# EAGLE board Smarttree_CMU_6 (EAGLE 7.7.0)
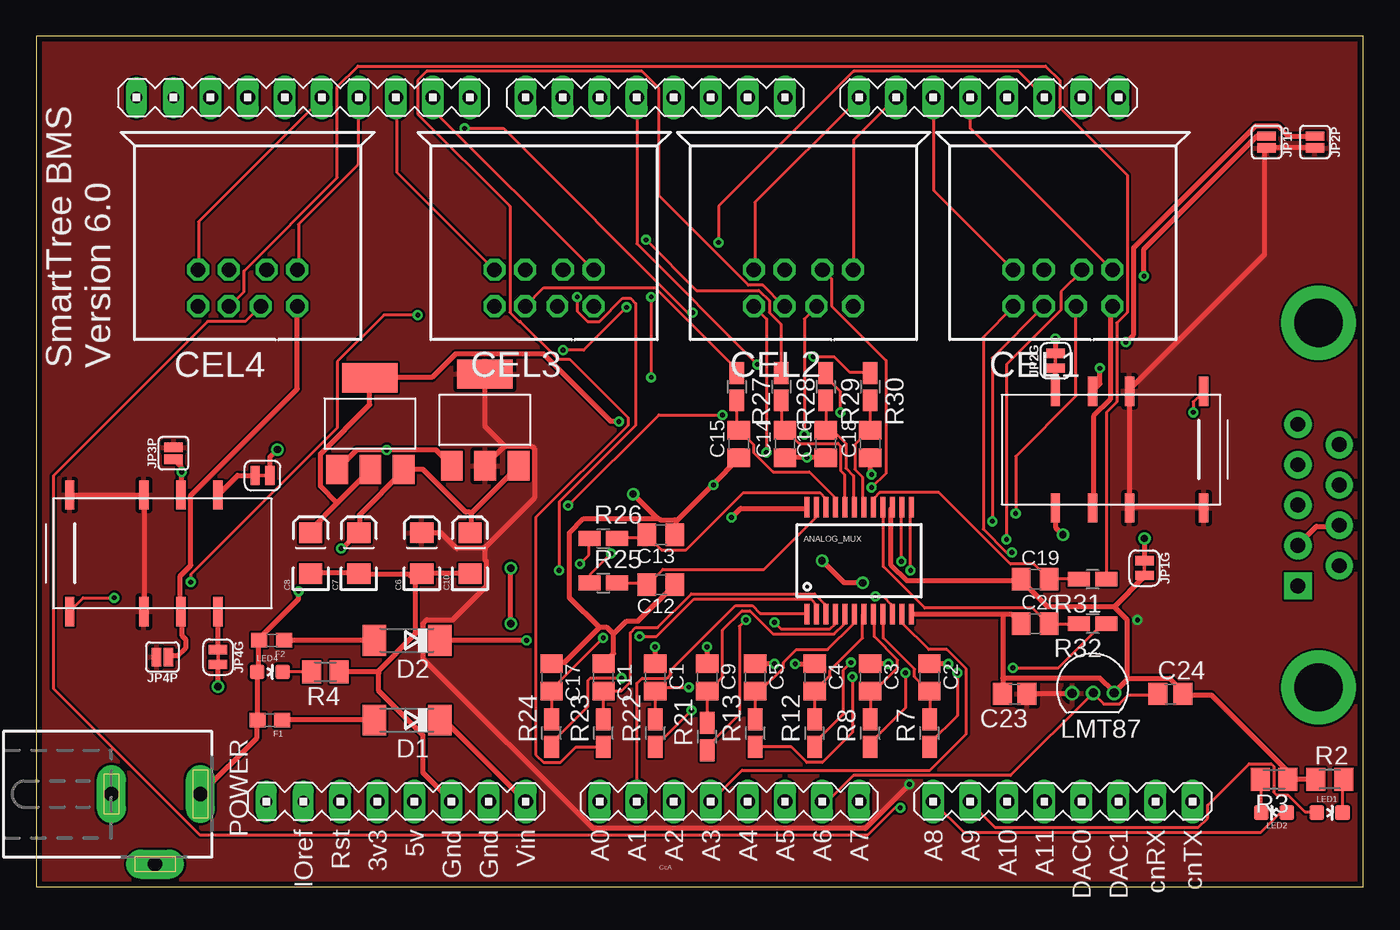
[diagram p0: board, top side]
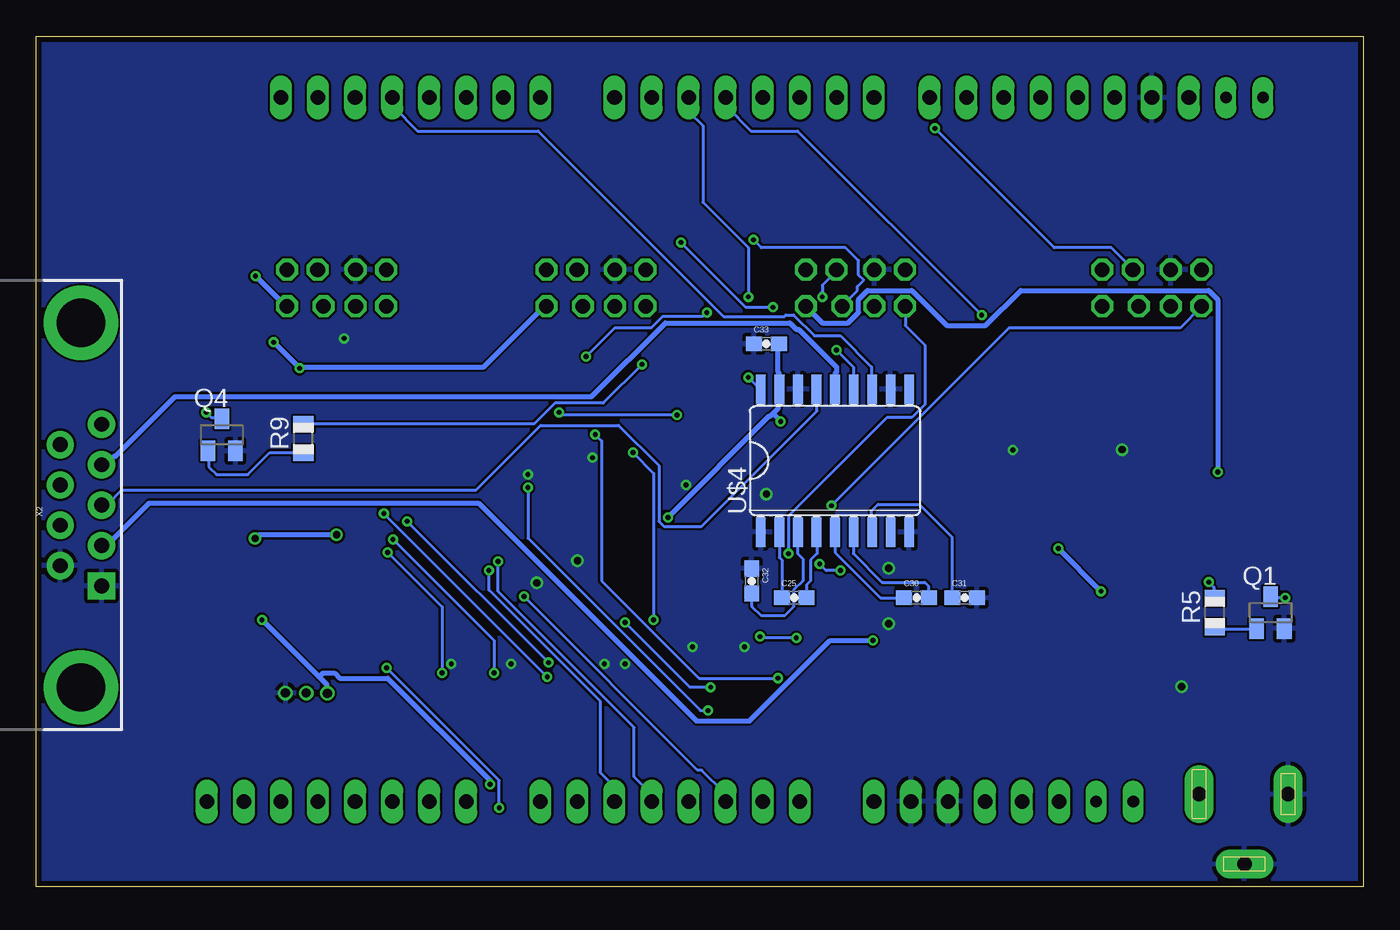
[diagram p1: board, bottom side, seen from below]

Size 90.93 x 58.29 mm. Coordinates in mm from the lower left corner, seen from the top.
Outline: 0,0 90.93,0 90.93,58.29 0,58.29 0,0
Copper layers (1*16): Top 0.0356mm / dielectric 1.5011mm / Bottom 0.0356mm
Design rules "LaenPCBOrder": minimum track width 6mil, minimum drill 13mil, track to track 6mil, track to pad 6mil, pad to pad 6mil, via to via 6mil, smd to smd 6mil, copper to edge 15mil, drill to drill 6mil, minimum pad ring 7mil, minimum via ring 7mil, stop-mask expansion 3mil, vias tented up to drill 0mil, thermal gap 10mil
Net classes: 1 power: width 0.33 mm, clearance 0.152 mm

## Footprints (pad centres in the part's own frame; a part is rotated, then mirrored left to right if it is on the bottom)
SOT223 = smd 1.499 x 2.007: 1 -2.261,-3.15; 2 0.025,-3.15; 3 2.311,-3.15 | smd 3.81 x 2.007: 4 0,3.15
SSOP24 = smd 0.348 x 1.397: 1 -3.575,-3.656; 2 -2.925,-3.656; 3 -2.275,-3.656; 4 -1.625,-3.656; 5 -0.975,-3.656; 6 -0.325,-3.656; 7 0.325,-3.656; 8 0.975,-3.656; 9 1.625,-3.656; 10 2.275,-3.656; 11 2.925,-3.656; 12 3.575,-3.656; 13 3.575,3.656; 14 2.925,3.656; 15 2.275,3.656; 16 1.625,3.656; 17 0.975,3.656; 18 0.325,3.656; 19 -0.325,3.656; 20 -0.975,3.656; 21 -1.625,3.656; 22 -2.275,3.656; 23 -2.925,3.656; 24 -3.575,3.656
C-0805 = smd 1.27 x 1.524: 1 -0.953,0; 2 0.953,0
EIA3216 = smd 1.4 x 1.6: A 1.4,0; C -1.4,0
C0805 = smd 1.3 x 1.5: 1 -0.85,0; 2 0.85,0
0603-CAP = smd 1.1 x 1: 1 -0.85,0; 2 0.85,0
8PINCONN = drill 1 octagon: 1 -1.3,-8.5; 2 1.3,-8.5; 3 -3.4,-8.5; 4 -1.3,-11; 5 3.4,-8.5; 6 -3.4,-11; 7 0.9,-11; 8 3.4,-11
SOD106-R = smd 1.6 x 2.1: A 2.25,0; C -2.25,0
0603 = smd 1.1 x 1: 1 -0.85,0; 2 0.85,0
SMT-JUMPER_2_NC_TRACE_SILK = smd 0.635 x 1.27: 1 -0.508,0; 2 0.508,0
SMT-JUMPER_2_NO_SILK = smd 0.635 x 1.27: 1 -0.406,0; 2 0.406,0
LED-0603 = smd 1 x 1: A 0,-0.877; C 0,0.877
LMT87_TO = drill 0.635: GND 0.305,-1.346; OUT 1.727,-1.346; VDD 3.175,-1.321
DCJ0202 = drill 1 pad 2 long: 1 0,3.1; 2 4.8,0; 3 0,-3
SOT23 = smd 1 x 1.4: 1 -0.95,-1.1; 2 0.95,-1.1; 3 0,1.1
M0805 = smd 1.3 x 1.6: 1 -0.95,0; 2 0.95,0
R0805 = smd 1.1 x 1.4: 1 -1,0; 2 1,0
R0805W = smd 1.5 x 1: 1 -0.94,0; 2 0.94,0
DUE(NORMAL) = drill 1 long: 2 -16.51,30.48; 3 -19.05,30.48; 3V3 -39.37,-17.78; 4 -21.59,30.48; 5 -24.13,30.48; 5V -36.83,-17.78; 6 -26.67,30.48; 7 -29.21,30.48; 8 -33.02,30.48; 9 -35.56,30.48; 10 -38.1,30.48; 11 -40.64,30.48; 12 -43.18,30.48; 13 -45.72,30.48; A0 -24.13,-17.78; A1 -21.59,-17.78; A2 -19.05,-17.78; A3 -16.51,-17.78; A4 -13.97,-17.78; A5 -11.43,-17.78; A6 -8.89,-17.78; A7 -6.35,-17.78; A8 -1.27,-17.78; A9 1.27,-17.78; A10 3.81,-17.78; A11 6.35,-17.78; AREF -50.8,30.48; AREF1 -50.8,30.48; CANRX 13.97,-17.78; CANTX 16.51,-17.78; DAC0 8.89,-17.78; DAC1 11.43,-17.78; GND1 -48.26,30.48; GND_1 -34.29,-17.78; GND_2 -31.75,-17.78; RESET -41.91,-17.78; RX0 -11.43,30.48; RX1 6.35,30.48; RX2 1.27,30.48; RX3 -3.81,30.48; SCL 11.43,30.48; SDA 8.89,30.48; TX0 -13.97,30.48; TX1 3.81,30.48; TX2 -1.27,30.48; TX3 -6.35,30.48; VIN -29.21,-17.78 | drill 0.8 pad 1.422 long: IOREF -44.45,-17.78; NC -46.99,-17.78; SCL1 -55.88,30.48; SDA1 -53.34,30.48
RELAY-EE2 = smd 0.635 x 2: P$1 -6.35,4; P$3 -1.27,4; P$4 1.27,4; P$5 3.81,4; P$8 3.81,-4; P$9 1.27,-4; P$10 -1.27,-4; P$12 -6.35,-4
SO18 = smd 0.66 x 2.032: 1 -5.08,-4.902; 2 -3.81,-4.902; 3 -2.54,-4.902; 4 -1.27,-4.902; 5 0,-4.902; 6 1.27,-4.902; 7 2.54,-4.902; 8 3.81,-4.902; 9 5.08,-4.902; 10 5.08,4.902; 11 3.81,4.902; 12 2.54,4.902; 13 1.27,4.902; 14 0,4.902; 15 -1.27,4.902; 16 -2.54,4.902; 17 -3.81,4.902; 18 -5.08,4.902
DB9_MALE = drill 1.016 pad 1.88: 1 5.54,-1.42; 2 2.77,-1.42; 3 0,-1.42; 4 -2.77,-1.42; 6 4.15,1.42; 7 1.38,1.42; 8 -1.38,1.42; 9 -4.15,1.42 | drill 1.016 pad 1.88 square: 5 -5.54,-1.42 | drill 3.302 pad 5.08: G1 -12.5,0; G2 12.5,0

## Placement (x,y rotation side)
3V3_REG  REG1117  [SOT223]  22.86,31.75 0 top
5V_REG  REG1117  [SOT223]  30.73,32 0 top
ANALOG_MUX  MUX-74HC4067SMD  [SSOP24]  56.39,22.35 0 top
C1  [C-0805]  42.42,14.35 270 top
C2  [C-0805]  61.21,14.35 270 top
C3  [C-0805]  57.15,14.35 270 top
C4  [C-0805]  53.34,14.35 270 top
C5  [C-0805]  49.28,14.35 270 top
C6  10uF  [EIA3216]  26.42,22.86 90 top
C7  0.1uF  [EIA3216]  22.1,22.86 90 top
C8  10uF  [EIA3216]  18.8,22.86 90 top
C9  [C-0805]  45.97,14.35 270 top
C10  0.1uF  [EIA3216]  29.72,22.86 90 top
C11  [C-0805]  38.86,14.35 270 top
C12  [C-0805]  42.8,20.7 180 top
C13  [C-0805]  42.8,24.13 180 top
C14  [C-0805]  51.31,30.35 90 top
C15  [C-0805]  48.13,30.35 90 top
C16  [C-0805]  54.1,30.35 90 top
C17  [C-0805]  35.31,14.35 270 top
C18  [C-0805]  57.15,30.35 90 top
C19  [C-0805]  68.45,21.08 0 top
C20  [C-0805]  68.45,18.03 0 top
C23  [C0805]  67.06,13.21 180 top
C24  [C0805]  77.72,13.21 0 top
C25  0.1uF  [0603-CAP]  38.99,19.81 0 bottom
C30  0.1uF  [0603-CAP]  30.61,19.81 0 bottom
C31  0.1uF  [0603-CAP]  27.3,19.81 0 bottom
C32  0.1uF  [0603-CAP]  41.91,20.95 270 bottom
C33  0.1uF  [0603-CAP]  40.89,37.21 0 bottom
CEL1  8PINCONN  [8PINCONN]  70.36,50.8 0 top
CEL2  8PINCONN  [8PINCONN]  52.58,50.8 0 top
CEL3  8PINCONN  [8PINCONN]  34.8,50.8 0 top
CEL4  8PINCONN  [8PINCONN]  14.48,50.8 0 top
D1  [SOD106-R]  25.4,11.43 180 top
D2  [SOD106-R]  25.4,16.89 180 top
F1  PTC0603  [0603]  16,11.43 180 top
F2  PTC0603  [0603]  16.13,16.89 180 top
JP1G  JUMPER-SMT_2_NC_TRACE_SILK  [SMT-JUMPER_2_NC_TRACE_SILK]  75.95,21.84 270 top
JP1P  JUMPER-SMT_2_NO_SILK  [SMT-JUMPER_2_NO_SILK]  84.33,51.05 270 top
JP2G  JUMPER-SMT_2_NC_TRACE_SILK  [SMT-JUMPER_2_NC_TRACE_SILK]  69.85,36.07 90 top
JP2P  JUMPER-SMT_2_NO_SILK  [SMT-JUMPER_2_NO_SILK]  87.63,51.05 270 top
JP3G  JUMPER-SMT_2_NC_TRACE_SILK  [SMT-JUMPER_2_NC_TRACE_SILK]  15.49,28.19 0 top
JP3P  JUMPER-SMT_2_NO_SILK  [SMT-JUMPER_2_NO_SILK]  9.4,29.72 90 top
JP4G  JUMPER-SMT_2_NC_TRACE_SILK  [SMT-JUMPER_2_NC_TRACE_SILK]  12.45,15.75 270 top
JP4P  JUMPER-SMT_2_NO_SILK  [SMT-JUMPER_2_NO_SILK]  8.64,15.75 180 top
LED1  [LED-0603]  88.65,5.08 270 top
LED2  [LED-0603]  84.84,5.08 90 top
LED4  [LED-0603]  16,14.73 270 top
LMT87  LMT87_PAC  [LMT87_TO]  74.17,11.94 180 top
POWER  DCJ0202  [DCJ0202]  8.13,6.35 270 top
Q1  [SOT23]  6.35,18.8 0 bottom
Q4  [SOT23]  78.23,30.99 0 bottom
R2  330  [M0805]  88.65,7.37 0 top
R3  330  [M0805]  84.84,7.37 180 top
R4  [M0805]  19.81,14.73 180 top
R5  330  [R0805]  10.16,18.8 90 bottom
R7  [R0805W]  61.21,10.54 90 top
R8  [R0805W]  57.15,10.54 90 top
R9  330  [R0805]  72.64,30.73 90 bottom
R12  [R0805W]  53.34,10.54 90 top
R13  [R0805W]  49.28,10.54 90 top
R21  [R0805W]  45.97,10.29 90 top
R22  [R0805W]  42.42,10.54 90 top
R23  [R0805W]  38.86,10.54 90 top
R24  [R0805W]  35.31,10.54 90 top
R25  [R0805W]  38.86,20.83 0 top
R26  [R0805W]  38.86,23.88 0 top
R27  [R0805W]  48.01,34.29 270 top
R28  [R0805W]  51.05,34.29 270 top
R29  [R0805W]  54.1,34.29 270 top
R30  [R0805W]  57.15,34.29 270 top
R31  [R0805W]  72.39,21.08 180 top
R32  [R0805W]  72.39,18.03 180 top
U$1  DUE(OUTLINE)  [DUE(NORMAL)]  62.74,23.62 0 top
U$2  RELAY-SINGLE_LATCH  [RELAY-EE2]  73.66,29.97 180 top
U$3  RELAY-SINGLE_LATCH  [RELAY-EE2]  8.64,22.86 0 top
U$4  MAX3222  [SO18]  36.2,29.21 0 bottom
X2  [DB9_MALE]  87.88,26.16 90 bottom

## Library data of the parts
3V3_REG 5V_REG = burr-brown; MPN: REG1117; OC_FARNELL: 1097566; OC_NEWARK: 14P6981
ANALOG_MUX = SparkFun-AnalogIC; OC_NEWARK: unknown
C1-C5 C9 C11-C20 = cap-pan40; OC_NEWARK: unknown
C6-C8 C10 = SparkFun-Retired; OC_NEWARK: unknown; PROD_ID: CAP-00811
C23 C24 Q1 Q4 R5 R9 = adafruit
C25 C30-C33 F1 F2 = SparkFun
CEL1-CEL4 U$2 U$3 = SmartTreeCan
D1 D2 = diode; OC_NEWARK: unknown
JP1G JP1P JP2G JP2P JP3G JP3P JP4G JP4P = SparkFun-Jumpers
LED1 LED2 LED4 = SparkFun-LED; PROD_ID: DIO-09003
LMT87 = nick
POWER = con-jack; OC_FARNELL: unknown; OC_NEWARK: unknown
R2-R4 = adafruit; OC_NEWARK: unknown
R7 R8 R12 R13 R21-R32 = resistor; OC_NEWARK: unknown
U$1 = DUElib130425
U$4 = Francis-Project
X2 = SparkFun-Connectors; PROD_ID: CONN-09904

## Nets
3.3V [power]: 3V3_REG.2 3V3_REG.4 ANALOG_MUX.24 C8.A C33.2 U$4.17
5V [power]: 5V_REG.2 5V_REG.4 C6.A C23.1 JP1P.2 JP2P.2 JP3P.2 JP4P.2 LMT87.VDD U$2.P$1 U$2.P$3 U$2.P$10 U$3.P$1 U$3.P$3 U$3.P$10
12V [power]: 3V3_REG.3 5V_REG.3 C7.A C10.A F1.2 F2.2 LED4.A POWER.1
!RES_CEL_1&2: R9.2 U$1.4
!RES_CEL_3&4: R5.2 U$1.3
ADDR0: ANALOG_MUX.10 U$1.A2
ADDR1: ANALOG_MUX.11 U$1.A3
ADDR2: ANALOG_MUX.14 U$1.A4
ADDR3: ANALOG_MUX.13 U$1.A5
AOUT: ANALOG_MUX.1 U$1.A1
BUTTON: U$1.A0
CEL1_PWR [power]: CEL1.8 JP1P.1 U$2.P$4
CEL2_PWR [power]: CEL2.8 JP2P.1 U$2.P$9
CEL3_PWR [power]: CEL3.8 JP3P.1 U$3.P$4
CEL4_PWR [power]: CEL4.8 JP4P.1 U$3.P$9
CSI1: CEL1.4 R12.1
CSI2: CEL2.4 R23.1
CSI3: CEL3.4 R27.1
CSI4: CEL4.4 R31.1
CSO1: CEL1.2 R8.1
CSO2: CEL2.2 R22.1
CSO3: CEL3.2 R26.1
CSO4: CEL4.2 R30.1
GND [power]: 3V3_REG.1 5V_REG.1 ANALOG_MUX.12 ANALOG_MUX.15 C1.1 C2.1 C3.1 C4.1 C5.1 C6.C C7.C C8.C C9.1 C10.C C11.1 C12.1 C13.1 C14.1 C15.1 C16.1 C17.1 C18.1 C19.1 C20.1 C23.2 C24.2 C31.2 C32.1 C33.1 CEL1.1 CEL2.1 CEL3.1 CEL4.1 JP1G.2 JP2G.2 JP3G.2 JP4G.2 LMT87.GND POWER.2 POWER.3 Q1.2 Q4.2 R2.1 R3.1 R4.1 U$1.GND1 U$1.GND_1 U$1.GND_2 U$4.1 U$4.9 U$4.11 U$4.16 X2.5 X2.9
L1: LED1.A U$1.A9
L2: LED2.A U$1.A8
N$1 [power]: JP1G.1 U$2.P$5
N$2: C31.1 U$4.7
N$3: Q4.3 U$2.P$12
N$5 [power]: D2.A F2.1
N$6: Q4.1 R9.1
N$7: Q1.1 R5.1
N$8: C25.1 U$4.2
N$9: Q1.3 U$3.P$12
N$10 [power]: JP3G.1 U$3.P$5
N$11 [power]: JP4G.1 U$3.P$8
N$13 [power]: D1.C U$1.VIN
N$14: C25.2 U$4.4
N$15: C30.1 U$4.5
N$16: C30.2 U$4.6
N$17: ANALOG_MUX.6 C5.2 R13.2
N$18: C32.2 U$4.3
N$19: ANALOG_MUX.8 C3.2 R8.2
N$20: ANALOG_MUX.7 C4.2 R12.2
N$21 [power]: JP2G.1 U$2.P$8
N$24: ANALOG_MUX.5 C9.2 R21.2
N$26: ANALOG_MUX.4 C1.2 R22.2
N$28: ANALOG_MUX.3 C11.2 R23.2
N$30: ANALOG_MUX.2 C17.2 R24.2
N$32: ANALOG_MUX.23 C12.2 R25.2
N$34: ANALOG_MUX.22 C13.2 R26.2
N$36: ANALOG_MUX.21 C15.2 R27.2
N$38: ANALOG_MUX.20 C14.2 R28.2
N$39: ANALOG_MUX.19 C16.2 R29.2
N$42: ANALOG_MUX.18 C18.2 R30.2
N$43: ANALOG_MUX.17 C19.2 R31.2
N$46: ANALOG_MUX.16 C20.2 R32.2
N$57: LED1.C R2.2
N$58: LED2.C R3.2
N$59: LED4.C R4.2
N$69 [power]: D1.A F1.1
RI1: CEL1.3 U$1.TX2
RI2: CEL2.3 U$1.TX3
RI3: CEL3.3 U$1.10
RI4: CEL4.3 U$1.12
RO1: CEL1.5 U$1.RX2
RO2: CEL2.5 U$1.RX3
RO3: CEL3.5 U$1.9
RO4: CEL4.5 U$1.11
RX [power]: U$4.14 X2.2
RX1: U$1.RX1 U$4.13
SCRN_PWR [power]: D2.C X2.4 X2.8
SHDN: U$1.2 U$4.18
TS1: CEL1.6 R7.1
TS1OUT: ANALOG_MUX.9 C2.2 R7.2
TS2: CEL2.6 R21.1
TS3: CEL3.6 R25.1
TS4: CEL4.6 R29.1
TS_CON: C24.1 LMT87.OUT U$1.A6
TX: U$4.15 X2.3
TX1: U$1.TX1 U$4.12
VS1: CEL1.7 R13.1
VS2: CEL2.7 R24.1
VS3: CEL3.7 R28.1
VS4: CEL4.7 R32.1

## Tracks (layer width: path | path; a pad name or v marks a point on that pad's centre or on a via)
3.3V  (via drill 0.33)
  Top 0.33: 20.62,26.3 22.85,28.52 3V3_REG.2 | 20.62,26.3 18.85,24.52 18.85,24.35 C8.A | 20.62,26.3 19.47,27.46 19.47,29.68 22.85,33.06 22.85,34.84 3V3_REG.4 23.02,34.93 27.11,34.93 28.71,36.52 34.76,36.52 39.38,31.9 v39.92,31.9 | v47.65,25.32 48.27,25.95 52.81,25.95 ANALOG_MUX.24
  Bottom 0.33: C33.2 40.09,37.15 40.09,35.28 40.01,35.19 U$4.17 40.01,33.06 40.09,32.97 40.09,32.79 40.45,32.44 | v47.65,25.32 40.72,32.26 40.63,32.26 40.45,32.44 | 40.45,32.44 v39.92,31.9
5V  (via drill 0.33)
  Top 0.33: 30.67,23.19 28.8,23.19 27.74,24.26 26.49,24.26 C6.A | 30.67,23.19 34.14,26.66 34.14,30.04 33.96,30.21 32.09,30.21 | 32.09,30.21 30.76,28.88 5V_REG.2 | 32.09,30.21 30.76,31.55 30.76,35.1 5V_REG.4 | U$3.P$10 7.38,18.92 7.38,26.84 U$3.P$3 7.2,26.84 2.31,26.84 U$3.P$1 | C23.1 67.92,13.23 70.94,13.23 LMT87.VDD | JP2P.2 87.57,50.66 84.37,50.66 JP1P.2 84.19,50.57 84.19,43.37 74.94,34.12 U$2.P$10 74.94,33.95 74.94,26.12 U$2.P$3 | U$2.P$3 74.94,26.03 80.01,26.03 U$2.P$1 | 74.94,25.86 U$2.P$3 | v59.83,7.01 56.81,3.99 38.14,3.99 26.49,15.63 26.49,18.03 26.76,18.3 28.54,18.3 30.85,20.61 30.85,22.3 30.76,22.39 30.76,23.1 30.67,23.19
  Bottom 0.33: v75.48,18.3 71.56,14.39 | 71.56,14.39 71.03,13.86 71.03,13.32 LMT87.VDD | v59.83,7.01 59.83,7.28 66.85,14.3 70.14,14.3 70.5,14.66 71.3,14.66 71.56,14.39
  pour Top: -7.62,63.5 -10.16,63.5 -10.16,-12.7 101.6,-12.7 101.6,63.5
12V  (via drill 0.33)
  Top 0.33: 29.78,25.59 29.78,24.35 C10.A | 5V_REG.3 29.78,25.59 | 29.78,25.59 29.69,25.68 29.43,25.68 26.49,28.61 25.34,28.61 3V3_REG.3 25.16,28.52 22.14,25.5 22.14,24.35 C7.A 21.96,24.17 20.98,23.19 v20.89,23.19 | POWER.1 11.29,6.39 15.11,10.21 15.11,11.28 F1.2 15.11,11.46 15.11,14.57 LED4.A 15.2,14.74 15.2,16.88 F2.2 15.29,17.06 17.96,19.72 v17.96,20.26
  Bottom 0.33: v17.96,20.26 v20.89,23.19
!RES_CEL_1&2  (via drill 0.33)
  Top 0.203: v49.43,35.81 41.16,44.08 41.16,54.04 U$1.4
  Bottom 0.203: v49.43,35.81 52.09,33.15 55.38,33.15 56.81,31.73 R9.2
!RES_CEL_3&4  (via drill 0.33)
  Top 0.203: v10.58,20.88 10.58,21.41 20.62,31.46 20.62,35.99 23.82,39.19 v26.14,39.19
  Bottom 0.203: v10.58,20.88 10.22,20.52 10.22,19.81 R5.2 | v26.14,39.19 38.76,51.82 41.96,51.82 43.65,53.51 43.65,54.04 U$1.3
ADDR0  (via drill 0.33)
  Top 0.203: v57.52,19.9 58.05,19.9 58.59,19.37 58.59,18.74 ANALOG_MUX.10
  Bottom 0.203: v57.52,19.9 45.61,7.99 45.34,7.99 43.74,6.39 43.74,5.86 U$1.A2
ADDR1
  Top 0.203: ANALOG_MUX.11 59.38,18.66 59.38,18.03 61.16,16.26 62.41,16.26 63.74,14.92 63.74,10.48 61.25,7.99 48.36,7.99 46.23,5.86 U$1.A3
ADDR2  (via drill 0.33)
  Top 0.203: v59.3,22.3 59.3,25.95 ANALOG_MUX.14
  Bottom 0.203: v59.3,22.3 59.3,20.26 49.96,10.92 49.96,7.54 48.81,6.39 48.81,5.86 U$1.A4
ADDR3  (via drill 0.33)
  Top 0.203: v59.92,21.68 59.92,25.95 ANALOG_MUX.13
  Bottom 0.203: v59.92,21.68 59.92,20.34 52.27,12.7 52.27,7.81 51.38,6.92 51.38,5.86 U$1.A5
AOUT
  Top 0.203: ANALOG_MUX.1 52.81,18.74 49.61,18.74 49.07,19.28 47.92,19.28 43.47,14.83 43.47,14.57 43.2,14.3 41.52,14.3 41.16,13.94 41.16,5.86 U$1.A1
CEL1_PWR  (via drill 0.33)
  Top 0.33: JP1P.1 83.66,51.46 75.92,43.73 v75.92,41.86 | U$2.P$4 72.45,26.03 72.45,32.26 73.61,33.41 73.61,39.64 73.7,39.73 CEL1.8
  Bottom 0.33: v75.92,41.86 73.79,39.73 CEL1.8
CEL2_PWR  (via drill 0.33)
  Top 0.33: JP2P.1 85.79,51.46 85.08,52.17 83.57,52.17 75.21,43.82 75.21,37.86 v74.68,37.33 | v72.9,35.55 72.9,34.48 72.45,34.04 U$2.P$9
  Bottom 0.33: v74.68,37.33 v72.9,35.55 72.81,35.64 60.27,35.64 56.19,39.73 56.01,39.73 CEL2.8
CEL3_PWR  (via drill 0.33)
  Top 0.33: JP3P.1 9.91,28.8 9.91,28.44 | 9.91,28.44 U$3.P$4 | v9.96,28.44 9.91,28.44
  Bottom 0.33: v9.96,28.44 9.96,40.26 10.58,40.88 23.47,40.88 25.87,38.48 28.54,38.48 30.94,40.88 33.96,40.88 34.58,40.26 34.58,39.37 35.29,38.66 37.07,38.66 38.14,39.73 CEL3.8
CEL4_PWR
  Top 0.33: CEL4.8 17.87,39.73 17.87,34.12 10.58,26.84 10.58,22.03 9.87,21.32 9.87,19.01 U$3.P$9 9.96,18.74 9.96,17.23 10.22,16.97 10.22,16.34 9.69,15.81 9.07,15.81 JP4P.1
CSI1  (via drill 0.33)
  Top 0.203: R12.1 53.34,9.86 55.3,11.81 55.3,14.83 v55.83,15.37 | v65.52,25.06 65.52,36.26 68.99,39.73 CEL1.4
  Bottom 0.203: v65.52,25.06 v55.83,15.37
CSI2
  Top 0.203: R23.1 38.85,9.59 36.98,9.59 35.92,8.52 34.76,8.52 34.23,9.05 34.23,25.32 40.54,31.64 40.54,32.17 36.54,36.17 35.74,36.17 33.16,38.75 33.07,38.75 32.45,39.37 32.45,46.66 26.14,52.97 26.14,55.28 26.76,55.91 41.52,55.91 42.67,54.75 42.67,47.37 48.81,41.24 49.78,41.24 51.21,39.82 CEL2.4
CSI3
  Top 0.203: R27.1 48.01,35.46 42.41,41.06 34.76,41.06 33.52,39.82 CEL3.4
CSI4
  Top 0.203: R31.1 73.34,21.15 73.34,32.52 74.05,33.24 74.05,38.66 74.77,39.37 74.77,48.79 70.14,53.42 70.14,55.28 69.16,56.26 22.05,56.26 20.62,54.84 20.62,48.62 14.22,42.22 14.22,40.79 13.25,39.82 CEL4.4
CSO1  (via drill 0.33)
  Top 0.203: v59.56,14.66 59.56,12.26 57.16,9.86 57.16,9.68 R8.1 | v66.5,23.81 66.5,35.81 70.23,39.55 70.23,40.79 71.65,42.22 CEL1.2
  Bottom 0.203: v59.56,14.66 59.56,16.88 v66.5,23.81
CSO2  (via drill 0.33)
  Top 0.203: v44.9,12.08 42.49,9.68 R22.1 | v57.25,27.37 58.23,28.35 58.23,36.08 54.5,39.82 54.5,41.68 53.96,42.22 CEL2.2
  Bottom 0.203: v44.9,12.08 45.43,12.08 57.25,23.9 v57.25,27.37
CSO3  (via drill 0.33)
  Top 0.203: v37.25,22.12 37.87,22.75 37.87,23.81 R26.1 | v35.83,21.68 35.83,26.39 41.07,31.64 41.07,39.99 40.72,40.35 40.18,40.35 38.58,38.75 37.78,38.75 37.07,39.46 v37.07,40.44
  Bottom 0.203: v37.25,22.12 36.8,21.68 v35.83,21.68 | v37.07,40.44 37.16,40.53 37.16,40.7 37.07,40.79 37.07,41.24 36.09,42.22 CEL3.2
CSO4  (via drill 0.33)
  Top 0.203: v53.25,36.35 54.67,36.35 55.74,35.28 57.07,35.28 R30.1 | v44.98,39.37 44.63,39.37 32,51.99 v29.34,51.99
  Bottom 0.203: v53.25,36.35 51.3,38.3 48.81,38.3 48.01,39.1 45.25,39.1 v44.98,39.37 | v29.34,51.99 21.16,43.82 17.25,43.82 15.73,42.3 CEL4.2
GND  (via drill 0.33, 0.5)
  Top 0.33: 43.83,25.06 43.83,24.17 C13.1 | 46.36,27.59 48.09,29.32 C15.1 | 46.36,27.59 43.83,25.06 | 38.58,17.77 36.18,15.37 35.38,15.37 C17.1 | 38.58,17.77 39.12,17.77 39.56,17.32 | 39.56,17.32 39.56,15.99 38.94,15.37 C11.1 | 39.56,17.32 40.45,18.21 41.25,18.21 43.74,20.7 C12.1 | 42.58,25.23 37.52,25.23 36.54,24.26 36.54,19.81 38.58,17.77 | 43.83,25.06 43.74,25.15 42.76,25.15 42.67,25.23 42.58,25.23 | C8.C 18.85,21.5 22.05,21.5 C7.C 22.23,21.41 25.51,21.41 25.87,21.06 C6.C | 23.38,14.74 20.8,14.74 R4.1 | 23.38,14.74 25.96,17.32 25.96,20.97 26.4,21.41 C6.C | C10.C 29.69,21.5 26.58,21.5 C6.C | ANALOG_MUX.15 58.59,25.95 58.59,22.03 59.65,20.97 67.39,20.97 C19.1 67.56,20.97 69.34,19.19 73.88,19.19 | 66.23,18.66 66.85,18.66 67.47,18.03 C20.1 | 66.23,18.66 60.01,18.66 ANALOG_MUX.12 | 66.23,18.66 66.23,14.3 | 66.23,14.3 66.23,13.23 C23.2 | 5V_REG.1 27.38,29.95 v24,29.95 21.96,29.95 20.62,28.61 3V3_REG.1 | C14.1 51.38,29.41 v52.81,29.41 54.05,29.41 C16.1 | R2.1 R3.1 85.7,7.46 85.7,7.99 80.54,13.14 78.68,13.14 C24.2 78.5,13.23 78.5,13.5 77.7,14.3 74.85,14.3 | 74.85,14.3 73.88,13.32 LMT87.GND 73.79,13.41 72.9,14.3 66.23,14.3 | v42.41,16.43 42.41,15.37 C1.1 | v45.96,16.43 45.96,15.37 C9.1 | v50.58,15.28 49.34,15.28 C5.1 | v52.01,15.28 53.34,15.28 C4.1 | v58.41,15.28 57.16,15.28 C3.1 | v62.5,15.28 61.25,15.28 C2.1 | v57.25,28.26 57.16,28.35 57.16,29.32 C18.1 | 73.88,19.19 74.77,18.3 74.77,14.39 74.85,14.3 | 23.38,14.74 23.47,14.66 23.47,13.41 26.49,10.39 26.49,7.81 28.45,5.86 U$1.GND_1 | v46.41,27.55 46.36,27.59 | v12.45,13.72 JP4G.2 | 73.88,19.19 75.95,21.26 JP1G.2 | v69.85,37.59 JP2G.2 | JP3G.2 16,29.46 v16.51,29.97
  Top 0.33: v32.51,18.03 v32.51,21.84 | 42.58,25.23 v40.89,26.92 | v56.64,20.83 55.37,20.83 v53.85,22.35
  pour Bottom: -2.54,30.48 -2.54,-5.08 93.98,-5.08 93.98,50.8 93.98,63.5 -2.54,63.5
L1
  Top 0.203: LED1.A 87.74,5.14 86.94,5.14 85.79,6.3 84.99,6.3 84.81,6.48 84.81,8.26 84.63,8.43 83.12,8.43 80.28,5.59 80.28,4.7 79.65,4.08 65.7,4.08 64.01,5.77 U$1.A9
L2
  Top 0.203: LED2.A 85.7,5.05 85.25,5.05 83.92,3.72 63.56,3.72 61.52,5.77 U$1.A8
N$1  (via drill 0.5)
  Top 0.33: U$2.P$5 69.85,24.64 v70.36,24.13 | v75.95,23.88 JP1G.1
  Bottom 0.33: v70.36,24.13 75.69,24.13 v75.95,23.88
N$2
  Bottom 0.203: C31.1 28.18,19.81 28.18,23.99 30.4,26.21 33.25,26.21 33.69,25.77 33.69,24.35 U$4.7
N$3  (via drill 0.33)
  Top 0.203: v79.3,32.52 79.3,33.24 80.01,33.95 U$2.P$12
  Bottom 0.203: v79.3,32.52 78.94,32.17 78.23,32.17 Q4.3
N$5
  Top 0.33: F2.1 16.98,16.88 23.11,16.88 D2.A
N$6
  Bottom 0.203: R9.1 72.72,29.77 74.94,29.77 76.45,28.26 78.59,28.26 79.12,28.79 79.12,29.86 Q4.1
N$7
  Bottom 0.203: Q1.1 7.38,17.68 10.05,17.68 10.13,17.77 R5.1
N$8
  Bottom 0.203: U$4.2 40.01,22.57 39.83,22.39 39.83,19.81 C25.1
N$9  (via drill 0.33)
  Top 0.203: v5.33,19.81 3.2,19.81 2.31,18.92 U$3.P$12
  Bottom 0.203: v5.33,19.81 6.31,19.81 Q1.3
N$10
  Top 0.33: U$3.P$5 13.78,28.19 JP3G.1
N$11
  Top 0.33: JP4G.1 U$3.P$8
N$13
  Top 0.33: U$1.VIN 28,11.37 27.74,11.37 D1.C
N$14
  Bottom 0.203: C25.2 38.14,20.7 37.87,20.97 37.87,22.39 37.43,22.84 37.43,24.26 U$4.4
N$15
  Bottom 0.203: C30.1 33.07,19.81 36.18,22.92 36.18,24.26 U$4.5
N$16
  Bottom 0.203: C30.2 29.78,19.81 29.78,20.61 30.04,20.87 32.97,20.87 34.94,22.84 34.94,24.26 U$4.6
N$17
  Top 0.203: ANALOG_MUX.6 56.01,18.66 56.01,18.03 54.23,16.26 52.09,16.26 51.21,15.37 51.21,15.01 49.61,13.41 49.34,13.41 C5.2 49.25,13.32 49.25,11.54 R13.2
N$18
  Bottom 0.203: C32.2 41.87,20.08 41.87,19.19 41.25,18.57 39.65,18.57 39.03,19.19 39.03,20.34 38.41,20.97 38.41,22.48 38.76,22.84 38.76,24.26 U$4.3
N$19
  Top 0.203: ANALOG_MUX.8 57.43,18.66 57.43,17.15 59.03,15.54 59.03,15.01 57.43,13.41 57.16,13.41 C3.2 57.16,13.32 57.16,11.54 R8.2
N$20
  Top 0.203: ANALOG_MUX.7 56.63,18.66 56.63,17.06 54.41,14.83 54.41,14.48 C4.2 R12.2
N$21
  Top 0.33: U$2.P$8 JP2G.1
N$24
  Top 0.203: ANALOG_MUX.5 55.38,18.66 55.38,18.03 54.67,17.32 50.49,17.32 48.9,18.92 48.36,18.92 47.03,17.59 47.03,14.39 46.05,13.41 C9.2 45.96,13.32 45.96,11.28 R21.2
N$26  (via drill 0.33)
  Top 0.203: v50.58,18.12 51.03,17.68 54.41,17.68 54.76,18.03 54.76,18.66 ANALOG_MUX.4 | v44.72,13.68 42.76,13.68 42.49,13.41 C1.2 42.41,13.32 42.41,11.54 R22.2
  Bottom 0.203: v50.58,18.12 46.14,13.68 v44.72,13.68
N$28
  Top 0.203: ANALOG_MUX.3 54.05,18.74 54.05,19.37 53.34,20.08 44.9,20.08 42.58,17.77 41.07,17.77 40.72,17.41 40.72,14.03 40.09,13.41 38.94,13.41 C11.2 38.85,13.32 38.85,11.54 R23.2
N$30  (via drill 0.33)
  Top 0.203: v41.34,17.15 42.49,17.15 45.07,19.72 53.07,19.72 53.43,19.37 53.43,18.74 ANALOG_MUX.2 | v38.85,17.06 35.38,13.59 35.38,13.41 C17.2 35.29,13.32 35.29,11.54 R24.2
  Bottom 0.203: v41.34,17.15 41.25,17.06 v38.85,17.06
N$32
  Top 0.203: ANALOG_MUX.23 53.43,25.95 53.43,25.32 49.87,21.77 42.94,21.77 41.87,20.7 C12.2 41.87,20.79 39.83,20.79 R25.2
N$34
  Top 0.203: ANALOG_MUX.22 54.05,26.03 54.05,26.66 53.7,27.01 48.45,27.01 44.54,23.1 42.85,23.1 41.87,24.08 C13.2 41.78,24.08 41.6,23.9 39.83,23.9 R26.2
N$36
  Top 0.203: ANALOG_MUX.21 54.76,26.03 54.76,26.66 52.98,28.44 50.49,28.44 49.16,29.77 49.16,30.3 48.18,31.28 C15.2 48.09,31.37 48.01,31.46 R27.2
N$38
  Top 0.203: ANALOG_MUX.20 55.38,26.03 55.38,28.26 55.12,28.52 55.12,30.21 54.94,30.39 52.27,30.39 51.38,31.28 C14.2 51.3,31.37 51.12,31.55 51.12,33.33 R28.2
N$39
  Top 0.203: ANALOG_MUX.19 56.01,26.03 56.01,28.17 55.47,28.7 55.47,30.39 54.59,31.28 54.14,31.28 C16.2 54.14,31.37 54.14,33.33 R29.2
N$42
  Top 0.203: ANALOG_MUX.18 56.63,26.03 56.63,28.08 56.1,28.61 56.1,30.3 57.07,31.28 C18.2 57.16,31.37 57.16,33.33 R30.2
N$43
  Top 0.203: ANALOG_MUX.17 57.43,26.03 57.43,26.66 57.78,27.01 61.87,27.01 66.76,22.12 68.36,22.12 C19.2 69.43,21.15 71.39,21.15 R31.2
N$46
  Top 0.203: ANALOG_MUX.16 58.05,25.95 58.05,21.95 60.9,19.1 68.28,19.1 69.34,18.03 C20.2 R32.2
N$57
  Top 0.203: LED1.C 89.52,5.14 89.52,7.37 R2.2
N$58
  Top 0.203: LED2.C 83.92,5.14 83.92,7.37 R3.2
N$59
  Top 0.203: LED4.C 16.89,14.74 18.85,14.74 R4.2
N$69
  Top 0.33: F1.1 16.89,11.46 23.11,11.46 D1.A
RI1
  Top 0.203: U$1.TX2 61.52,54.04 61.52,47.73 66.94,42.3 CEL1.3
RI2
  Top 0.203: CEL2.3 49.25,42.3 49.25,46.93 56.36,54.04 U$1.TX3
RI3
  Top 0.203: U$1.10 24.71,54.04 24.71,48.97 31.38,42.3 CEL3.3
RI4
  Top 0.203: CEL4.3 11.11,42.3 11.11,45.59 19.56,54.04 U$1.12
RO1
  Top 0.203: U$1.RX2 64.01,51.99 73.7,42.3 CEL1.5
RO2
  Top 0.203: CEL2.5 56.01,42.3 56.01,51.19 58.85,54.04 U$1.RX3
RO3
  Top 0.203: U$1.9 27.2,54.04 27.2,53.24 38.14,42.3 CEL3.5
RO4
  Top 0.203: CEL4.5 17.96,42.3 17.96,45.41 22.05,49.51 22.05,54.04 U$1.11
RX
  Bottom 0.33: U$4.14 36.18,34.12 36.18,35.19 36.09,35.28 36.09,35.64 38.67,38.21 38.85,38.21 39.29,38.66 47.83,38.66 52.9,33.59 81.43,33.59 85.52,29.5 85.61,29.5 86.14,28.97 86.41,28.97 X2.2
RX1  (via drill 0.33)
  Top 0.203: v36.09,36.79 37.52,36.79 v40.45,39.73 | v46.76,44.17 46.76,46.66 56.01,55.91 67.3,55.91 69.08,54.13 U$1.RX1
  Bottom 0.203: v36.09,36.79 34.94,35.64 34.94,34.12 U$4.13 | v40.45,39.73 42.32,39.73 v46.76,44.17
SCRN_PWR  (via drill 0.33)
  Top 0.33: v33.6,16.88 27.74,16.88 D2.C | X2.8 89.26,24.7 87.74,24.7 86.5,23.46 X2.4
  Bottom 0.33: v33.6,16.88 36.54,16.88 42.05,11.37 45.7,11.37 60.63,26.3 83.21,26.3 86.06,23.46 86.41,23.46 X2.4
SHDN  (via drill 0.33)
  Top 0.203: v42.14,40.44 v42.14,34.93
  Bottom 0.203: v42.14,34.93 41.34,34.12 U$4.18 | v42.14,40.44 42.14,43.82 45.25,46.93 45.25,52.17 46.23,53.15 U$1.2
TS1  (via drill 0.33)
  Top 0.203: v63.12,14.66 63.12,11.72 61.25,9.86 61.25,9.68 R7.1 | v66.85,22.92 66.5,22.92 64.9,24.52 64.9,37.68 66.94,39.73 CEL1.6
  Bottom 0.203: v63.12,14.66 63.12,19.19 v66.85,22.92
TS1OUT
  Top 0.203: ANALOG_MUX.9 58.05,18.66 58.05,17.06 60.19,14.92 60.19,14.39 61.16,13.41 C2.2 61.25,13.32 61.25,11.54 R7.2
TS2  (via drill 0.33)
  Top 0.203: v48.63,18.3 48.18,17.86 48.18,11.81 46.05,9.68 46.05,9.41 R21.1 | v50.05,29.77 50.05,38.93 49.25,39.73 CEL2.6
  Bottom 0.203: v48.63,18.3 48.63,28.35 v50.05,29.77
TS3  (via drill 0.33)
  Top 0.203: v39.38,22.84 37.96,21.41 37.96,20.88 R25.1
  Bottom 0.203: v39.38,22.84 39.38,25.41 32.63,32.17 30.94,32.17 30.05,33.06 30.05,37.15 31.38,38.48 31.38,39.73 CEL3.6
TS4  (via drill 0.33)
  Top 0.203: v55.12,32.52 55.12,33.95 54.14,34.93 54.14,35.19 R29.1 | v47.03,32.35 42.67,32.35 v36.45,26.12
  Bottom 0.203: v55.12,32.52 54.94,32.35 v47.03,32.35 | v36.45,26.12 24.27,38.3 12.54,38.3 11.11,39.73 CEL4.6
TS_CON
  Top 0.203: C24.1 76.81,13.14 74.85,13.14 74.23,12.52 73.17,12.52 72.45,13.23 LMT87.OUT 72.36,13.23 66.76,7.63 56.01,7.63 54.23,5.86 53.87,5.86 U$1.A6
TX
  Bottom 0.203: U$4.15 37.43,34.04 37.43,32.61 45.34,24.7 47.92,24.7 48.27,25.06 48.27,28.88 51.03,31.64 56.36,31.64 60.81,27.19 85.08,27.19 86.06,26.21 86.41,26.21 X2.3
TX1
  Bottom 0.203: U$4.12 33.69,34.12 33.69,35.64 35.83,37.77 37.6,37.77 39.03,39.19 39.56,39.19 39.65,39.1 43.83,39.1 56.54,51.82 64.81,51.82 66.5,53.51 66.5,54.04 U$1.TX1
VS1  (via drill 0.33)
  Top 0.203: v55.92,14.39 55.92,10.57 53.87,8.52 52.81,8.52 51.74,9.59 49.34,9.59 R13.1 | v67.12,25.59 67.12,29.5 71.21,33.59 71.21,39.73 CEL1.7
  Bottom 0.203: v67.12,25.59 v55.92,14.39
VS2  (via drill 0.33)
  Top 0.203: v40.09,14.3 37.96,14.3 37.78,14.12 37.78,12.34 35.38,9.94 35.38,9.68 R24.1 | v52.63,31.01 52.63,38.93 53.43,39.73 CEL2.7
  Bottom 0.203: v40.09,14.3 45.52,14.3 52.18,20.97 52.18,30.57 v52.63,31.01
VS3  (via drill 0.33)
  Top 0.203: v41.78,44.35 45.25,40.88 49.52,40.88 50.23,40.17 50.23,39.37 51.03,38.57 51.03,35.28 R28.1
  Bottom 0.203: v41.78,44.35 41.25,43.82 35.47,43.82 34.58,42.93 34.58,41.95 34.23,41.59 34.67,41.15 34.67,40.88 35.74,39.82 CEL3.7
VS4  (via drill 0.33)
  Top 0.203: R32.1 73.08,18.03 70.05,15.01 v66.94,15.01 | v59.21,5.41 58.85,5.41 56.98,3.54 11.2,3.54 1.16,13.59 1.16,28.17 11.73,38.75 14.31,38.75 15.29,39.73 CEL4.7
  Bottom 0.203: v66.94,15.01 59.21,7.28 v59.21,5.41

## Text on the board
tPlace: SmartTree BMS / Version 6.0 | CcA
tDocu: ----Layout / ->make it nicer / ->put analog MUX on the top layer / ->make a debugging interface for sensor reading / ->switch bypass with jumper / -> DONE make sensor board connectors closer to the edge / -> add back 5V top and GND bottom planes